# Altium PCB Conn_Batt_Blade_F.PcbDoc
Units mm, origin at the board's own origin, x right, y up, seen from the top; angles counter-clockwise.
Board outline 18 x 30 mm, 2 copper layers (Component Side, Solder Side), stack 1.57 mm thick; 3 components, 7 nets, 15 pads, 0 vias.
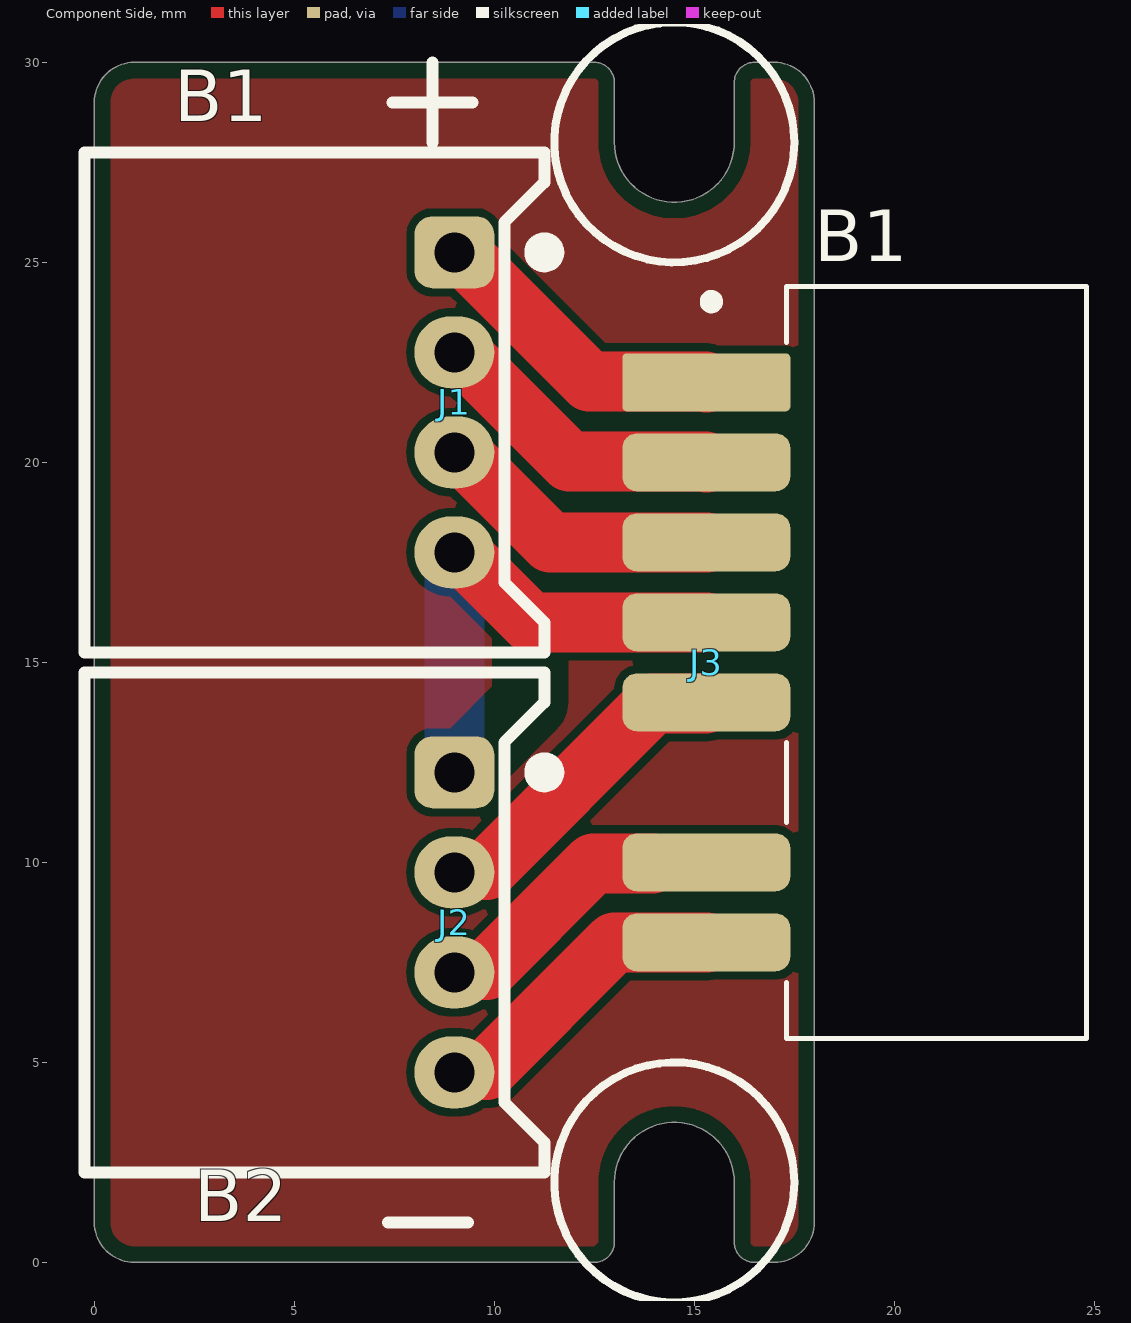
[diagram p0: Component Side view]
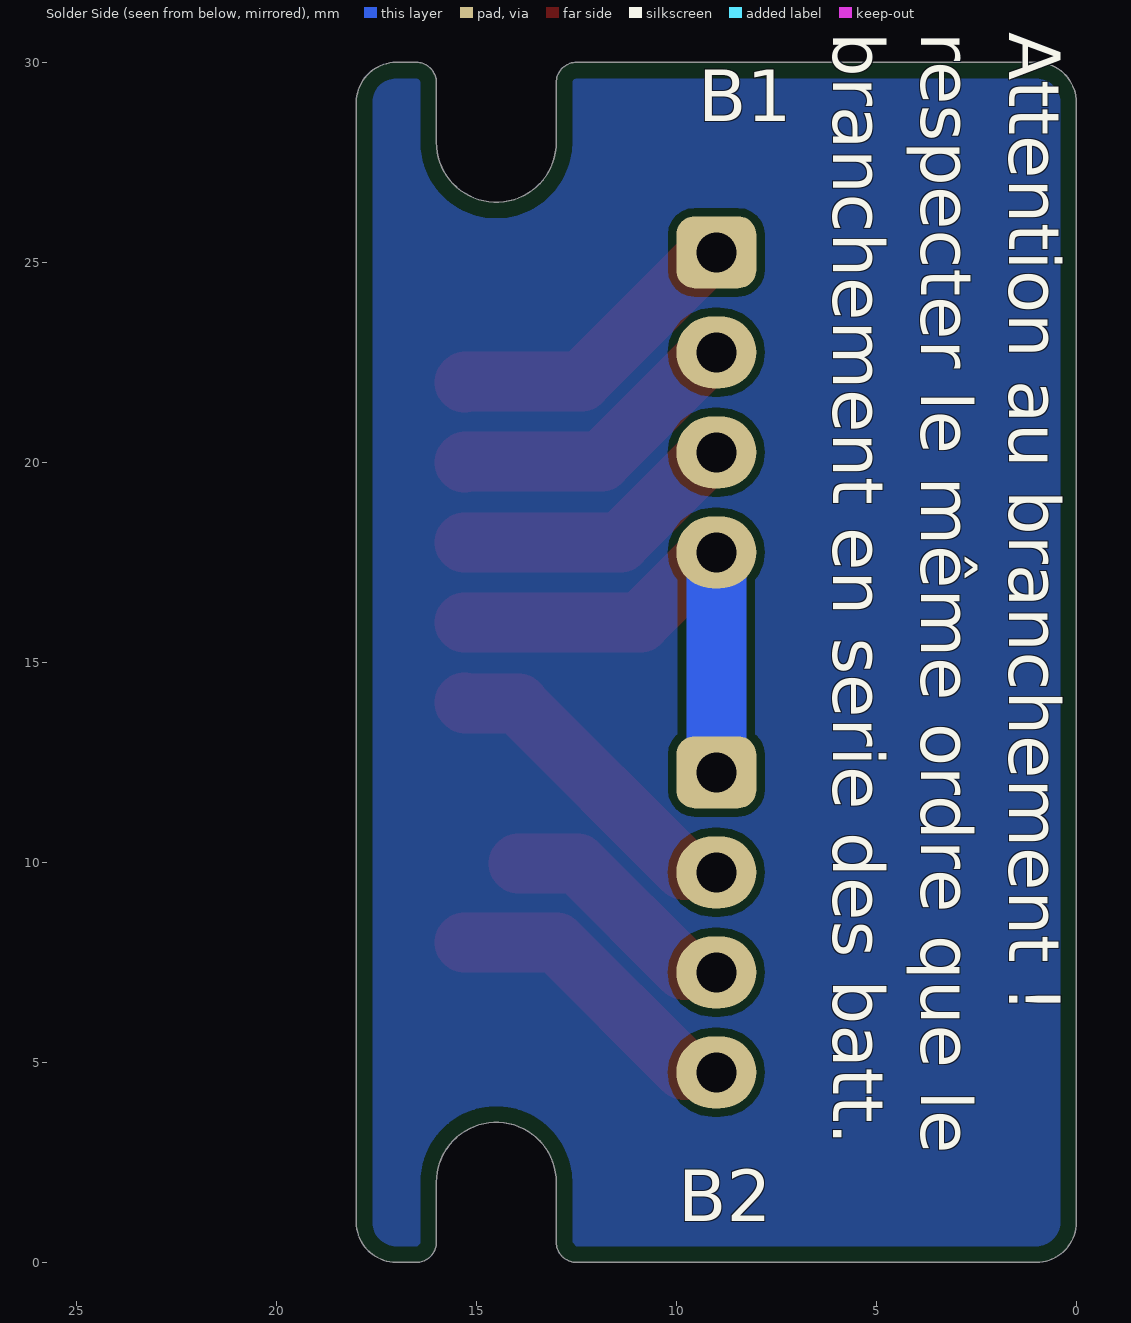
[diagram p1: Solder Side view, seen from below]
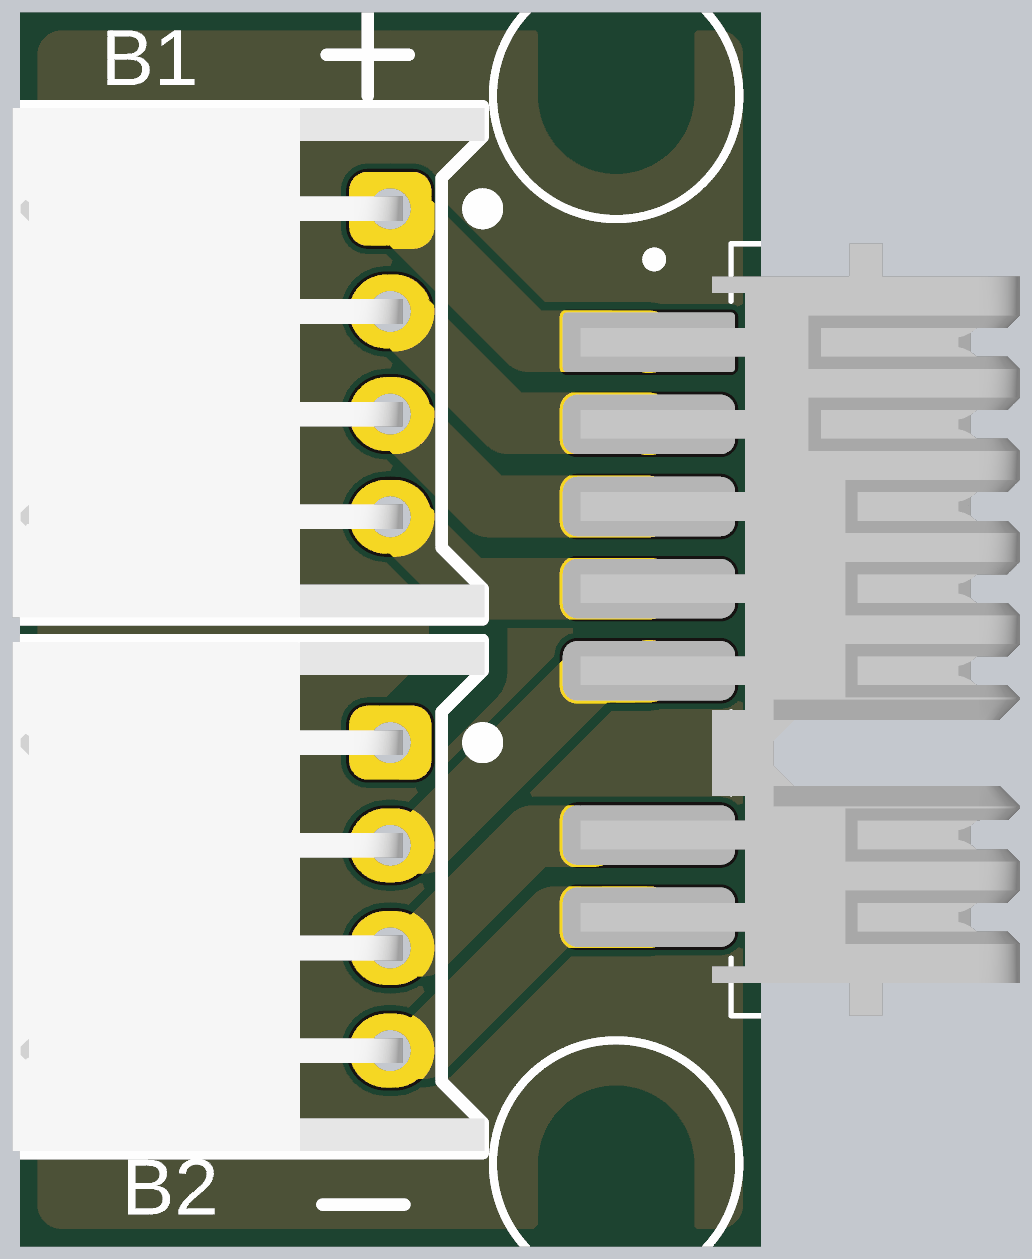
[diagram p2: 3D render of the assembled board from above, using the file's embedded part models]

## Layer stack, top to bottom
Top Solder: solder mask 0.01, Solder Resist, Dk 3.5
Component Side: signal copper 0.035
Dielectric 1: core 1.5, FR-4, Dk 4.8
Solder Side: signal copper 0.035
Bottom Solder: solder mask 0.01, Solder Resist, Dk 3.5

## Board outline
1,0 cw(c1,1) 0,1 0,29 cw(c1,29) 1,30 12.5,30 cw(c12.5,29.5) 13,29.5 13,28 ccw(c14.5,28) 16,28 16,29.5 cw(c16.5,29.5) 16.5,30 17,30 cw(c17,29) 18,29 18,0.998 18,1 cw(c17,1) 17,0 16.5,0 cw(c16.5,0.5) 16,0.5 16,2 ccw(c14.5,2) 13,2 13,0.5 cw(c12.5,0.5) 12.5,0

## Design rules (kind name [scope] priority, off if disabled: settings)
AssemblyTestPointUsage [All] p1 off:
AssemblyTestpoint [All] p1 off: testpointundercomponent=TRUE minsize=1.016 maxsize=2.54 preferedsize=1.524 minholesize=0 maxholesize=1.016 preferedholesize=0.813 testpointgrid=0.025 usegrid=TRUE gridtolerance=0 allowsidetop=TRUE allowsidebottom=TRUE
BoardOutlineClearance [All] p1: gap=0.4 ignorepadtopadclearanceinfootprint=FALSE
Clearance Clearance_polygon [InPolygon] p1: gap=0.2 ignorepadtopadclearanceinfootprint=FALSE except(0: Arc-Hole Track-Hole SMDPad-Hole THPad-Hole Via-Hole Fill-Hole Poly-Hole Region-Hole Text-Hole)
Clearance Clearance_for_power_net [InNetClass('Power') vs InNet('GND')] p2: gap=0.2 ignorepadtopadclearanceinfootprint=TRUE except(0: Arc-Hole Track-Hole SMDPad-Hole THPad-Hole Via-Hole Fill-Hole Poly-Hole Region-Hole Text-Hole)
Clearance Clearance_general [All] p3: gap=0.127 ignorepadtopadclearanceinfootprint=FALSE except(0: Arc-Hole Track-Hole SMDPad-Hole THPad-Hole Via-Hole Fill-Hole Poly-Hole Region-Hole Text-Hole)
ComponentClearance [All] p1: gap=0 collisioncheckmode=3 verticalgap=0 showdistances=FALSE
DiffPairsRouting [All] p1 off: maxlimit=0.254 minlimit=0.127 mostfreqgap=0.254 toplayer_minwidth=0.381 toplayer_maxwidth=0.381 toplayer_prefwidth=0.381 bottomlayer_minwidth=0.381 bottomlayer_maxwidth=0.381 bottomlayer_prefwidth=0.381 maxuncoupledlength=12.7
FabricationTestPointUsage TestPointUsage [All] p1 off: valid=0 allowmultiple=FALSE
FabricationTestpoint Testpoint [All] p1 off: side=3 testpointundercomponent=TRUE minsize=1.016 maxsize=2.54 preferedsize=1.524 minholesize=0 maxholesize=1.016 preferedholesize=0.813 testpointgrid=0.025 allowsidetop=TRUE allowsidebottom=TRUE usegrid=TRUE gridtolerance=0
FanoutControl Fanout_BGA [IsBGA] p1 off: bgadir=Out bgaviamode=Centered fanoutstyle=Auto fanoutdirection=Alternating viagrid=0.025 // Fanout_BGA (Default Rule)
FanoutControl Fanout_LCC [IsLCC] p2 off: bgadir=Out bgaviamode=Centered fanoutstyle=Auto fanoutdirection=Alternating viagrid=0.025 // Fanout_LCC (Default Rule)
FanoutControl Fanout_SOIC [IsSOIC] p3 off: bgadir=Out bgaviamode=Centered fanoutstyle=Auto fanoutdirection=Alternating viagrid=0.025 // Fanout_SOIC (Default Rule)
FanoutControl Fanout_Small [(CompPinCount < 5)] p4 off: bgadir=Out bgaviamode=Centered fanoutstyle=Auto fanoutdirection=OutThenIn viagrid=0.025 // Fanout_Small (Default Rule)
FanoutControl Fanout_Default [All] p5 off: bgadir=Out bgaviamode=Centered fanoutstyle=Auto fanoutdirection=Alternating viagrid=0.025 // Fanout_Default (Default Rule)
Height [All] p1: minheight=0 maxheight=50 prefheight=10
HoleSize [All] p1: absolutevalues=TRUE maxlimit=6.3 minlimit=0.2 maxpercent=80.000 minpercent=20.000
HoleToHoleClearance [All] p1: gap=0.4 allowstackedmicrovias=TRUE
MinimumAnnularRing [All] p1: minimumring=0.076
MinimumSolderMaskSliver [All] p1: minsoldermaskwidth=0.15
MinimumSolderMaskSliver SilkscreenOverComponentPads [All] p2 off: minsoldermaskwidth=0.254
NetAntennae [All] p1 off: netantennaetolerance=0
PlaneClearance [All] p1: clearance=0.5
PlaneConnect [All] p1: planeconnectstyle=Relief reliefexpansion=0.4 reliefentries=4 reliefconductorwidth=0.3 reliefairgap=0.2
PolygonConnect [All] p1: thpad.connectstyle=Relief thpad.reliefconductorwidth=0.25 thpad.reliefentries=4 thpad.polygonreliefangle="90 Angle" thpad.airgapwidth=0.254 smdpad.connectstyle=Relief smdpad.reliefconductorwidth=0.25 smdpad.reliefentries=4 smdpad.polygonreliefangle="90 Angle" smdpad.airgapwidth=0.254 via.connectstyle=Direct via.reliefconductorwidth=0.25 via.reliefentries=4 via.polygonreliefangle="90 Angle" via.airgapwidth=0.254
PolygonConnect PolygonConnect_Via_GND [All vs (InNet('GND') AND  IsVia)] p2: thpad.connectstyle=Relief thpad.reliefconductorwidth=0.25 thpad.reliefentries=4 thpad.polygonreliefangle="90 Angle" thpad.airgapwidth=0.254 smdpad.connectstyle=Relief smdpad.reliefconductorwidth=0.25 smdpad.reliefentries=4 smdpad.polygonreliefangle="90 Angle" smdpad.airgapwidth=0.254 via.connectstyle=Direct via.reliefconductorwidth=0.25 via.reliefentries=4 via.polygonreliefangle="90 Angle" via.airgapwidth=0.254
PolygonConnect PolygonConnect_Via_Power [(InNetClass('Power')  AND  IsVia)] p3: connectstyle=Relief reliefconductorwidth=0.25 reliefentries=4 polygonreliefangle="90 Angle" airgapwidth=0.254
RoutingCorners [All] p1: cornerstyle=45-Degree minsetback=1.5 maxsetback=2.54
RoutingVias [All] p1: holewidth=0.3 width=0.6 viastyle="Through Hole" minholewidth=0.3 minwidth=0.6 maxholewidth=0.3 maxwidth=1
SilkToSilkClearance [All] p1 off: silktosilkclearance=0.1
SolderMaskExpansion [All] p1: expansion=0.075 istentingtop=FALSE
Width [All] p1: maxlimit=15 minlimit=0.127 preferedwidth=0.5
10 further rules are at their usual default settings.

## Components (designator, comment, footprint, x,y, rotation, side; value= is the part's Value field where it differs from the comment)
J1 "Comment" CONN_JST_S4B-XH-A 9,21.5 r270 top
J2 "Comment" CONN_JST_S4B-XH-A 9,8.5 r270 top
J3 "Comment" CONN_TE_1827684-1 15.3,15 r90 top

## Footprints (in the part's own frame and the unit in brackets; to place one, negate y for a bottom-side part, rotate by r counter-clockwise, add the part's x,y. Pads: shape width x height; smd on the part's side, far side on the other; paste and mask are expansions set on the pad)
CONN_JST_S4B-XH-A [mm]
  rrect50% 1.8x2 hole 1: 1(-3.75,0)
  oval 1.8x2 hole 1: 2(-1.25,0) 3(1.25,0) 4(3.75,0)
  silkscreen extent -6.25,-9.25 6.25,2.5, body extent -6.2,-9.2 6.2,2.3, height 6.1
CONN_TE_1827684-1 [mm]
  rrect15% 1.45x4.2 smd: 1(7,0)
  rrect50% 1.45x4.2 smd: 2(5,0) 3(3,0) 4(1,0) 5(-1,0) 6(-5,0) 7(-7,0)
  silkscreen extent -9.4,-9.5 9.4,0.01, body extent -9.4,-9.03 9.4,1.67, height 3.3

## Nets (pads, with @x,y where several pads share a name; then routed paths per layer and width w, separated by ;. In a path a pad name is that pad's centre, name@x,y a point inside that pad or via, vN(x,y) a via of type N, cw(c..) or ccw(c..) an arc to the next point about the centre after c; other vN are vias at no path point)
B1_1_C3: J1.1 J3.1 | length 7.6
  Component Side w1.5: J1.1 9.15,25.25 12.375,22.025 15.275,22.025 J3.1
B1_2_C1: J1.3 J3.3 | length 7.2
  Component Side w1.5: J1.3 9.15,20.25 11.4,18 J3.3
B1_2_C2: J1.2 J3.2 | length 7.4
  Component Side w1.5: J1.2 9.15,22.75 11.875,20.025 15.275,20.025 J3.2
B1_4_GND: J1.4 J2.1 J3.4 | length 12.7
  Component Side w1.5: J2.1 J2.1@9.15,12.25 ; J1.4 9.15,17.75 10.9,16 J3.4
  Solder Side w1.5: J2.1 J1.4
B2_2_C2: J2.2 J3.5 | length 8.1
  Component Side w1.5: J2.2 9.057,9.807 9.807,9.807 13.925,13.925 13.925,13.95 13.95,13.975 15.275,13.975 J3.5
B2_3_C1: J2.3 J3.6 | length 6.1
  Component Side w1.5: J2.3 9.057,7.307 9.807,7.307 12.475,9.975 13.688,9.975 J3.6@13.95,9.975
B2_4_GND: J2.4 J3.7 | length 7.6
  Component Side w1.5: J2.4 9.057,4.807 9.807,4.807 13,8 J3.7

## Polygon pours and split planes (outlines as drawn)
no net on Component Side "NONET_L01_P000" (solid, pour order 0): 0,30 18,30 18,0 0,0
no net on Solder Side "NONET_L02_P001" (solid, pour order 1): 0,30 0,0 18,0 18,30

## Silkscreen, mask and mechanical layers (free items; w line width, h text height)
Top Overlay:
  circle w0.2: c14.5,28 r3
  circle w0.2: c14.5,2 r3
  lines w0.3: 7.345,1 9.345,1 ; 7.45,29 9.45,29 ; 8.45,28 8.45,30
  text "B1" at 2,28.097 h2.2
  text "B1" at 18,24.597 h2.2
  text "B2" at 2.5,0.597 h2.2
  text "B2" at 18.5,-2.903 h2.2
Bottom Overlay:
  text "Attention au branchement ! / respecter le même ordre que le / branchement en serie des batt." at 6.5,30.75 h2.2 r90
  text "B1" at 9.45,28.097 h2.2
  text "B2" at 9.95,0.597 h2.2
Board Outline:
  lines w0.1: 18,0.998 18,29 ccw(c17,29) 17,30 16.5,30 ccw(c16.5,29.5) 16,29.5 16,28 cw(c14.5,28) 13,28 13,29.5 ccw(c12.5,29.5) 12.5,30 1,30 ccw(c1,29) 0,29 0,1 ccw(c1,1) 1,0 12.5,0 ccw(c12.5,0.5) 13,0.5 13,2 cw(c14.5,2) 16,2 16,0.5 ccw(c16.5,0.5) 16.5,0 17,0 ccw(c17,1) 18,1

## Dimensions
0,29 to 18,29 on Dimension
1,0 to 1,30 on Dimension

## Text inside footprints (layer, text, board x,y; h text height)
J3: Top Assembly "PCB EDGE" at 19.11,11.571 h1.2 r90